# Altium PCB carrier_board.PcbDoc (part 15 of 18)
Units mm, origin at the board's own origin, x right, y up, seen from the top; angles counter-clockwise.
Board outline 146 x 102 mm, 20 copper layers (F.Cu, F.Mask, B.Cu, B.Mask, In1.Cu, F.SilkS, In2.Cu, B.SilkS, F.Adhes, B.Adhes, F.Paste, B.Paste, Dwgs.User, Cmts.User, Eco1.User, Eco2.User, Edge.Cuts, Margin, B.CrtYd, F.CrtYd); 256 components, 384 nets, 1262 pads, 1024 vias.
Unrouted connection lines stored in the file: 117.
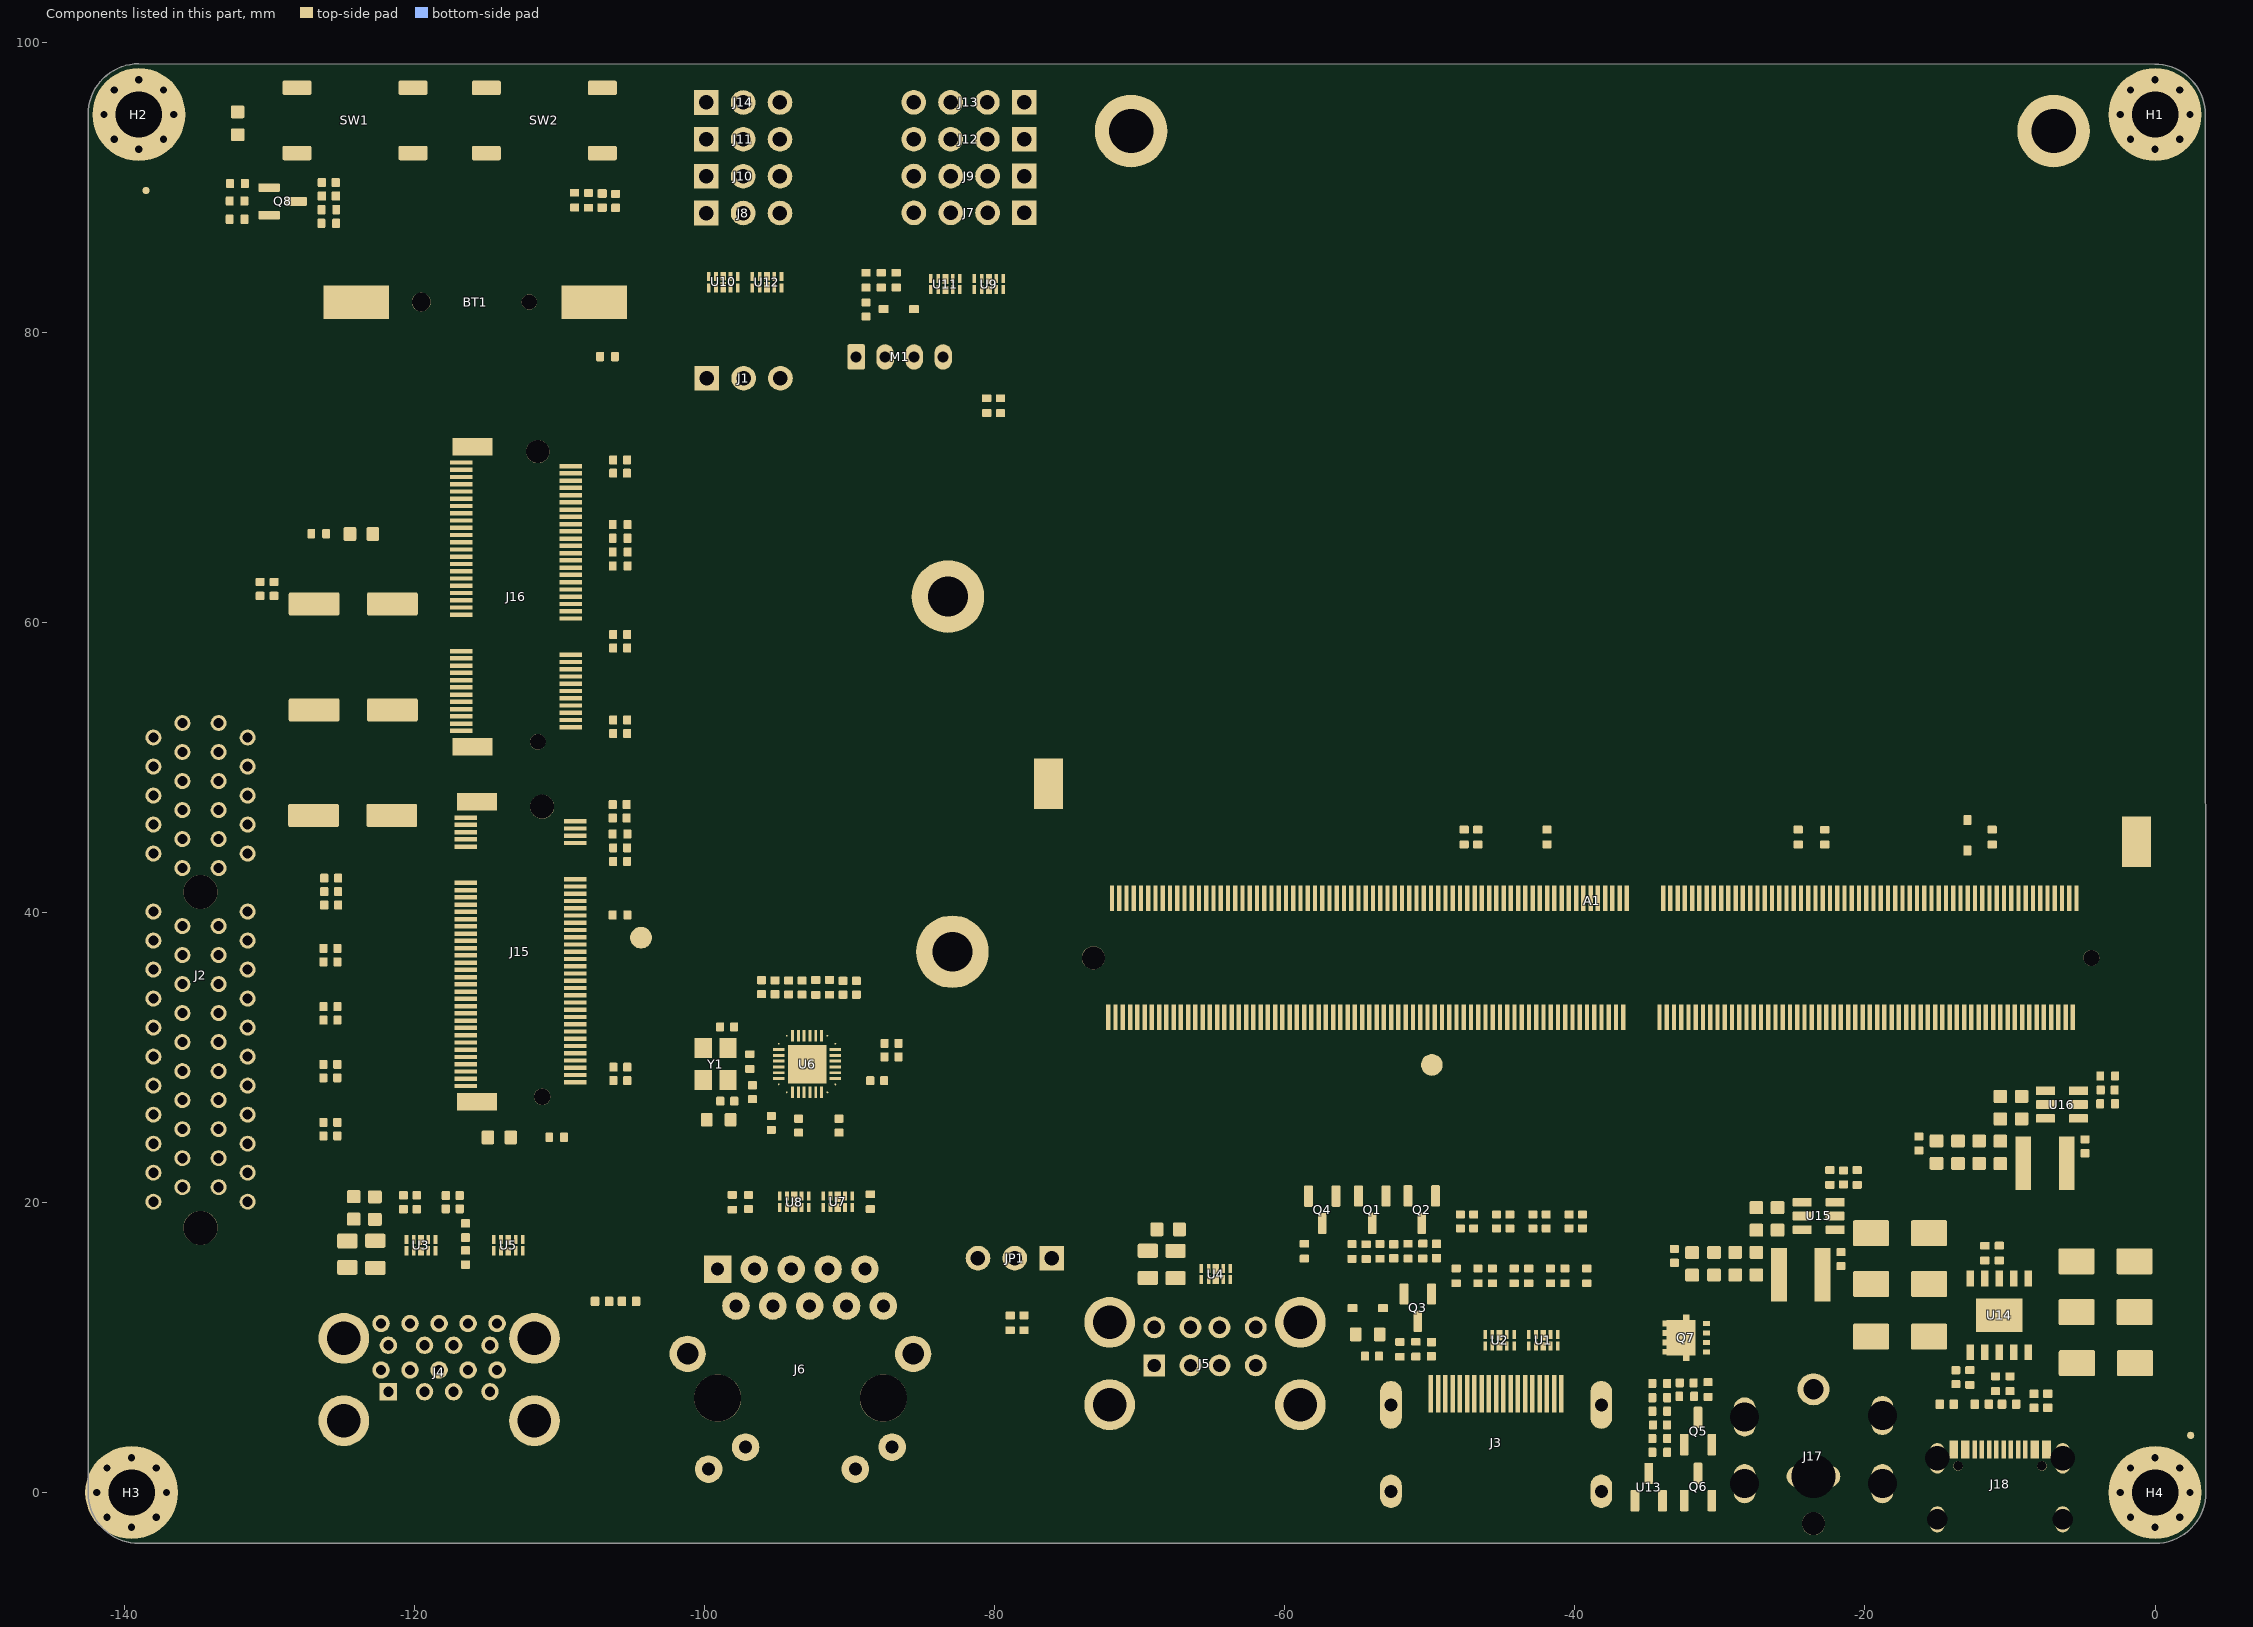
[diagram p25: the components of this part, seen from the top]

## Polygon pours and split planes (outlines as drawn) (continued)
SUSCLK_WIFI on F.Cu "F.Cu-/LattePanda Module/SUSCLK_WIFI-4" (solid, remove dead copper, pour order 31850): -104.28,45.564 -104.275,45.642 -104.263,45.698 -104.237,45.763 -104.209,45.827 -104.184,45.921 -104.38,45.961 -104.576,45.921 -104.535,45.789 -104.523,45.763 -104.493,45.684 -104.48,45.564
GbE_PCIe_RX- on F.Cu "F.Cu-/Gigabit Ethernet/GbE_PCIe_RX--1" (solid, remove dead copper, pour order 31970): -90.046,38.277 -90.037,38.439 -90.031,38.538 -90.05,38.679 -90.246,38.641 -90.412,38.529 -90.346,38.457 -90.303,38.428 -90.269,38.404 -90.241,38.376 -90.223,38.336 -90.216,38.277
GbE_PCIe_CLK- on F.Cu "F.Cu-/Gigabit Ethernet/GbE_PCIe_CLK-" (solid, remove dead copper, pour order 31942): -65.543,38.471 -65.381,38.462 -65.282,38.456 -65.141,38.475 -65.179,38.671 -65.291,38.837 -65.363,38.771 -65.392,38.728 -65.416,38.694 -65.444,38.666 -65.484,38.648 -65.543,38.641
GND on F.Cu "F.Cu-GND-71" (solid, remove dead copper, pour order 31740): -90.98,18.166 -90.975,18.205 -90.962,18.23 -90.921,18.248 -90.864,18.25 -90.783,18.253 -90.741,18.263 -90.699,18.284 -90.81,18.451 -90.976,18.561 -91.079,18.432 -91.121,18.382 -91.153,18.329 -91.173,18.262 -91.18,18.166
+5V on F.Cu "F.Cu-+5V-7" (solid, remove dead copper, pour order 31385): -21.83,22.43 -21.913,22.423 -22.004,22.415 -22.097,22.418 -22.178,22.442 -22.211,22.466 -22.235,22.5 -22.421,22.23 -22.235,21.96 -22.189,22.012 -22.115,22.04 -22.001,22.044 -21.913,22.037 -21.83,22.03
DDI_B_HPD on F.Cu "F.Cu-/HDMI/DDI_B_HPD-3" (solid, remove dead copper, pour order 31738): -31.016,30.705 -30.936,30.701 -30.878,30.689 -30.816,30.664 -30.752,30.639 -30.659,30.614 -30.619,30.81 -30.659,31.006 -30.794,30.965 -30.816,30.956 -30.895,30.927 -31.016,30.915
CON_USB3_D_N on F.Cu "F.Cu-/USB2.0&USB3.0/CON_USB3_D_N-1" (solid, remove dead copper, pour order 31934): -84.117,18.041 -84.168,18.046 -84.205,18.059 -84.251,18.103 -84.268,18.128 -84.306,18.182 -84.369,18.237 -84.481,18.071 -84.519,17.875 -84.414,17.859 -84.34,17.857 -84.279,17.862 -84.117,17.871
Net-(Q4-D) on F.Cu "F.Cu-Net-(Q4-D)-2" (solid, remove dead copper, pour order 31418): -38.816,15.964 -38.897,15.892 -39.001,15.817 -39.087,15.769 -39.177,15.735 -39.237,15.722 -39.297,15.72 -39.186,15.449 -38.865,15.388 -38.867,15.48 -38.832,15.591 -38.756,15.719 -38.671,15.819
I2C5_SDA on F.Cu "F.Cu-/GPIO/I2C5_SDA-1" (solid, remove dead copper, pour order 31065): 23 vertices, not listed, extent -85.736,87.224 -84.574,88.386
HSIO_9_TX- on F.Cu "F.Cu-/LattePanda Module/HSIO_9_TX--1" (solid, remove dead copper, pour order 31898): -61.364,29.651 -61.373,29.486 -61.379,29.385 -61.36,29.241 -61.164,29.279 -60.998,29.391 -61.069,29.473 -61.087,29.488 -61.142,29.548 -61.158,29.59 -61.163,29.651
+5V on F.Cu "F.Cu-+5V-6" (solid, remove dead copper, pour order 31104): 19 vertices, not listed, extent -87.551,77.264 -86.524,78.539
I2C3_SCL on F.Cu "F.Cu-/GPIO/I2C3_SCL-2" (solid, remove dead copper, pour order 32135): -82.975,83.37 -82.975,83.355 -82.979,83.285 -82.994,83.257 -83.025,83.245 -82.9,82.932 -82.775,83.245 -82.796,83.25 -82.811,83.262 -82.825,83.307 -82.825,83.355 -82.825,83.37
GND on F.Cu "F.Cu-GND-70" (solid, remove dead copper, pour order 32020): -23.065,33.924 -23.06,33.958 -23.047,33.978 -23.005,33.992 -22.981,33.994 -22.926,34 -22.869,34.024 -22.98,34.191 -23.176,34.229 -23.213,34.115 -23.225,34.092 -23.253,34.026 -23.265,33.924
+3V3 on F.Cu "F.Cu-+3V3-37" (solid, remove dead copper, pour order 31645): -109.15,24.59 -109.22,24.596 -109.303,24.615 -109.363,24.641 -109.412,24.678 -109.437,24.711 -109.451,24.75 -109.453,24.76 -109.691,24.49 -109.453,24.22 -109.426,24.285 -109.367,24.337 -109.269,24.375 -109.15,24.39
FAN_1_TAC on F.Cu "F.Cu-/Fan_Temp/FAN_1_TAC-2" (solid, remove dead copper, pour order 31824): -77.311,75.309 -77.259,75.251 -77.228,75.202 -77.201,75.138 -77.175,75.074 -77.126,74.989 -76.959,75.099 -76.849,75.266 -76.971,75.331 -76.998,75.341 -77.076,75.375 -77.169,75.451
GND on F.Cu "F.Cu-GND-69" (solid, remove dead copper, pour order 31819): -49.436,9.309 -49.384,9.251 -49.353,9.202 -49.326,9.138 -49.3,9.074 -49.251,8.989 -49.084,9.099 -48.974,9.266 -49.096,9.331 -49.123,9.341 -49.201,9.375 -49.294,9.451
GND on F.Cu "F.Cu-GND-68" (solid, remove dead copper, pour order 31876): -65.065,34.384 -65.06,34.452 -65.048,34.503 -65.01,34.577 -64.974,34.642 -64.944,34.741 -65.14,34.781 -65.336,34.741 -65.297,34.595 -65.274,34.51 -65.265,34.384
REFCLK0- on F.Cu "F.Cu-/LattePanda Module/REFCLK0--1" (solid, remove dead copper, pour order 31933): -49.545,38.532 -49.506,38.565 -49.47,38.581 -49.407,38.583 -49.377,38.577 -49.312,38.566 -49.229,38.572 -49.267,38.768 -49.379,38.934 -49.464,38.871 -49.518,38.82 -49.557,38.774 -49.665,38.653
Net-(D26-A) on F.Cu "F.Cu-Net-(D26-A)-2" (solid, remove dead copper, pour order 31384): -87.23,84.29 -87.313,84.283 -87.404,84.275 -87.497,84.278 -87.578,84.302 -87.611,84.326 -87.635,84.36 -87.821,84.09 -87.635,83.82 -87.589,83.872 -87.515,83.9 -87.401,83.904 -87.313,83.897 -87.23,83.89
DDC_SCL on F.Cu "F.Cu-/HDMI/DDC_SCL-2" (solid, remove dead copper, pour order 31346): -48.03,8.255 -48.028,8.229 -48.029,8.149 -48.045,8.118 -48.08,8.105 -47.93,6.804 -47.78,8.105 -47.803,8.11 -47.819,8.122 -47.833,8.167 -47.832,8.229 -47.83,8.255
+5V on F.Cu "F.Cu-+5V-5" (solid, remove dead copper, pour order 31152): 18 vertices, not listed, extent -69.441,16.18 -68.253,17.094
{\W\A\K\E\}\ on F.Cu "F.Cu-/~{WAKE}-3" (solid, remove dead copper, pour order 31868): -110.499,41.831 -110.551,41.889 -110.582,41.938 -110.609,42.002 -110.635,42.066 -110.684,42.151 -110.851,42.041 -110.961,41.874 -110.839,41.809 -110.812,41.799 -110.734,41.765 -110.641,41.689
DDC_SDA on F.Cu "F.Cu-/HDMI/DDC_SDA-1" (solid, remove dead copper, pour order 31615): -50.938,10.93 -50.959,10.827 -50.985,10.772 -51.024,10.722 -51.063,10.689 -51.11,10.666 -51.179,10.654 -50.965,10.389 -50.655,10.577 -50.694,10.615 -50.721,10.694 -50.733,10.831 -50.733,10.899 -50.732,10.93
TMDS_D2- on F.Cu "F.Cu-/HDMI/TMDS_D2--3" (solid, remove dead copper, pour order 32079): -41.783,11.322 -41.778,11.29 -41.77,11.229 -41.78,11.206 -41.805,11.197 -41.68,10.884 -41.555,11.197 -41.575,11.202 -41.586,11.215 -41.589,11.257 -41.582,11.29 -41.577,11.322
DDI_B_HPD on F.Cu "F.Cu-/HDMI/DDI_B_HPD-2" (solid, remove dead copper, pour order 31350): -54.482,21.031 -54.51,21.01 -54.55,20.996 -54.582,20.996 -54.612,21.011 -54.632,21.034 -54.647,21.071 -54.659,21.131 -54.921,20.444 -54.62,20.321 -54.602,20.447 -54.543,20.595 -54.441,20.758 -54.334,20.883
PCIE30_TX3_P on F.Cu "F.Cu-/PCIe x4/PCIE30_TX3_P" (solid, remove dead copper, pour order 31278): -136.723,24.843 -136.682,24.877 -136.645,24.894 -136.617,24.896 -136.591,24.888 -136.535,24.844 -136.478,24.772 -136.402,24.678 -136.306,24.593 -135.999,25.051 -136.457,25.356 -136.532,25.253 -136.593,25.184 -136.677,25.112 -136.843,24.963
Net-(U6-CKXTAL2) on F.Cu "F.Cu-Net-(U6-CKXTAL2)-2" (solid, remove dead copper, pour order 31204): 18 vertices, not listed, extent -98.771,27.24 -97.785,28.441
Net-(D26-A) on F.Cu "F.Cu-Net-(D26-A)-1" (solid, remove dead copper, pour order 31383): -87.38,83.89 -87.297,83.897 -87.206,83.905 -87.113,83.902 -87.032,83.878 -86.999,83.854 -86.975,83.82 -86.789,84.09 -86.975,84.36 -87.021,84.308 -87.095,84.28 -87.209,84.276 -87.297,84.283 -87.38,84.29
HSIO_3_RX- on F.Cu "F.Cu-/LattePanda Module/HSIO_3_RX-" (solid, remove dead copper, pour order 31928): -63.444,42.177 -63.439,42.228 -63.426,42.265 -63.382,42.311 -63.357,42.328 -63.303,42.366 -63.248,42.429 -63.414,42.541 -63.61,42.579 -63.626,42.474 -63.628,42.4 -63.623,42.339 -63.614,42.177
SOC_UART2_TX on F.Cu "F.Cu-/GPIO/SOC_UART2_TX" (solid, remove dead copper, pour order 31050): 23 vertices, not listed, extent -94.801,90.043 -93.466,91.457
Net-(U6-CKXTAL1) on F.Cu "F.Cu-Net-(U6-CKXTAL1)-1" (solid, remove dead copper, pour order 31137): 18 vertices, not listed, extent -100.234,29.633 -99.078,30.888
GND on F.Cu "F.Cu-GND-67" (solid, remove dead copper, pour order 31786): -9.815,41.994 -9.81,42.075 -9.798,42.132 -9.774,42.194 -9.748,42.258 -9.724,42.351 -9.92,42.391 -10.116,42.351 -10.076,42.223 -10.06,42.191 -10.029,42.113 -10.015,41.994
CON_USB4_SSRX_N on F.Cu "F.Cu-/USB2.0&USB3.0/CON_USB4_SSRX_N-3" (solid, remove dead copper, pour order 32024): -112.559,17.007 -112.559,17.013 -112.55,17.087 -112.527,17.119 -112.482,17.133 -112.53,17.446 -112.655,17.462 -112.667,17.323 -112.697,17.188 -112.719,17.091 -112.729,17.007
DDC_SCL on F.Cu "F.Cu-/HDMI/DDC_SCL-1" (solid, remove dead copper, pour order 31499): -49.895,17.275 -50.053,17.288 -50.14,17.313 -50.211,17.359 -50.248,17.42 -50.486,17.16 -50.248,16.9 -50.211,16.956 -50.139,16.996 -50.025,17.02 -49.895,17.025
TMDS_D0- on F.Cu "F.Cu-/HDMI/TMDS_D0--2" (solid, remove dead copper, pour order 32084): -44.793,10.547 -44.788,10.515 -44.78,10.454 -44.79,10.431 -44.815,10.422 -44.69,10.109 -44.565,10.422 -44.585,10.427 -44.596,10.44 -44.599,10.482 -44.592,10.515 -44.587,10.547
+3V3 on F.Cu "F.Cu-+3V3-36" (solid, remove dead copper, pour order 31449): -95.796,25.458 -95.667,25.559 -95.578,25.608 -95.481,25.649 -95.4,25.672 -95.32,25.681 -95.284,25.68 -95.399,25.961 -95.71,26.046 -95.71,25.94 -95.747,25.808 -95.824,25.662 -95.902,25.564
Net-(Q8-G) on F.Cu "F.Cu-Net-(Q8-G)-1" (solid, remove dead copper, pour order 31493): -131.348,89.558 -131.482,89.454 -131.566,89.408 -131.656,89.373 -131.723,89.36 -131.787,89.359 -131.793,89.36 -131.721,89.039 -131.45,88.935 -131.443,89.059 -131.399,89.207 -131.315,89.362 -131.242,89.452
SUSCLK_WIFI on F.Cu "F.Cu-/LattePanda Module/SUSCLK_WIFI-3" (solid, remove dead copper, pour order 31838): -39.57,37.324 -39.565,37.402 -39.553,37.458 -39.527,37.523 -39.499,37.587 -39.474,37.681 -39.67,37.721 -39.866,37.681 -39.825,37.549 -39.813,37.523 -39.783,37.444 -39.77,37.324
CON_USB3_SSRX_N on F.Cu "F.Cu-/USB2.0&USB3.0/CON_USB3_SSRX_N" (solid, remove dead copper, pour order 31958): -114.229,15.853 -114.238,15.691 -114.244,15.592 -114.225,15.451 -114.029,15.489 -113.863,15.601 -113.929,15.673 -113.972,15.702 -114.006,15.726 -114.034,15.754 -114.052,15.794 -114.059,15.853
+1V0 on F.Cu "F.Cu-+1V0-6" (solid, remove dead copper, pour order 31985): -93.528,33.656 -93.58,33.611 -93.624,33.584 -93.703,33.558 -93.775,33.537 -93.866,33.489 -93.756,33.322 -93.589,33.212 -93.534,33.322 -93.52,33.375 -93.493,33.455 -93.466,33.499 -93.422,33.55
CON_USB1_D_P on F.Cu "F.Cu-/USB2.0&USB3.0/CON_USB1_D_P-3" (solid, remove dead copper, pour order 32021): -63.779,14.242 -63.779,14.248 -63.77,14.322 -63.747,14.354 -63.702,14.367 -63.75,14.681 -63.875,14.697 -63.887,14.558 -63.917,14.423 -63.939,14.326 -63.949,14.242
CON_USB3_SSTX_N on F.Cu "F.Cu-/USB2.0&USB3.0/CON_USB3_SSTX_N-1" (solid, remove dead copper, pour order 31538): -120.081,19.027 -120.029,19.109 -119.984,19.152 -119.929,19.191 -119.867,19.222 -119.799,19.243 -119.69,19.252 -119.842,19.533 -120.152,19.568 -120.143,19.462 -120.167,19.301 -120.229,19.088 -120.251,19.027
Net-(U14-VBUS) on F.Cu "F.Cu-Net-(U14-VBUS)-1" (solid, remove dead copper, pour order 31379): -10.865,15.575 -10.867,15.505 -10.882,15.421 -10.898,15.382 -10.921,15.35 -10.953,15.328 -10.995,15.32 -10.74,14.769 -10.485,15.32 -10.518,15.325 -10.545,15.338 -10.585,15.387 -10.609,15.473 -10.615,15.575
+3V3 on F.Cu "F.Cu-+3V3-35" (solid, remove dead copper, pour order 31653): -107.995,31.38 -108.021,31.378 -108.101,31.379 -108.132,31.395 -108.145,31.43 -108.921,31.28 -108.145,31.13 -108.14,31.153 -108.128,31.169 -108.083,31.183 -108.021,31.182 -107.995,31.18
HSIO_10_TX- on F.Cu "F.Cu-/LattePanda Module/HSIO_10_TX--2" (solid, remove dead copper, pour order 31525): -124.816,29.003 -125.009,28.937 -125.123,28.908 -125.236,28.892 -125.3,28.892 -125.358,28.9 -125.321,28.59 -125.04,28.439 -125.027,28.561 -124.979,28.679 -124.9,28.778 -124.816,28.832
HSIO_10_TX+ on F.Cu "F.Cu-/LattePanda Module/HSIO_10_TX+-2" (solid, remove dead copper, pour order 31542): -124.816,29.275 -124.898,29.328 -124.942,29.374 -124.98,29.43 -125.01,29.493 -125.031,29.562 -125.04,29.668 -125.321,29.517 -125.358,29.207 -125.251,29.216 -125.091,29.192 -124.881,29.129 -124.816,29.104
DDI_B_TX1+ on F.Cu "F.Cu-/HDMI/DDI_B_TX1+" (solid, remove dead copper, pour order 31456): -42.384,19.683 -42.362,19.612 -42.295,19.37 -42.277,19.248 -42.285,19.142 -41.975,19.169 -41.817,19.45 -41.934,19.463 -42.04,19.511 -42.127,19.588 -42.158,19.635 -42.178,19.68 -42.179,19.683
GND on F.Cu "F.Cu-GND-66" (solid, remove dead copper, pour order 31754): -58.515,39.666 -58.52,39.585 -58.532,39.528 -58.556,39.466 -58.582,39.402 -58.606,39.309 -58.41,39.269 -58.214,39.309 -58.254,39.437 -58.27,39.469 -58.301,39.547 -58.315,39.666
GND on F.Cu "F.Cu-GND-65" (solid, remove dead copper, pour order 30996): 19 vertices, not listed, extent -86.914,92.466 -85.579,94.134
SOC_UART0_TX on F.Cu "F.Cu-/GPIO/SOC_UART0_TX" (solid, remove dead copper, pour order 31977): -64.307,76.393 -64.349,76.442 -64.375,76.485 -64.398,76.571 -64.416,76.647 -64.464,76.741 -64.631,76.631 -64.741,76.464 -64.625,76.404 -64.585,76.391 -64.507,76.361 -64.413,76.287
PCIE30_TX1_P on F.Cu "F.Cu-/PCIe x4/PCIE30_TX1_P" (solid, remove dead copper, pour order 31242): -136.758,32.862 -136.715,32.898 -136.677,32.916 -136.647,32.92 -136.619,32.913 -136.562,32.871 -136.491,32.785 -136.41,32.685 -136.306,32.593 -135.999,33.051 -136.306,33.507 -136.461,33.397 -136.566,33.31 -136.691,33.18 -136.878,32.982
+3V3 on F.Cu "F.Cu-+3V3-34" (solid, remove dead copper, pour order 32159): -108.885,27.98 -108.885,27.989 -108.884,28.031 -108.875,28.077 -108.849,28.115 -108.799,28.13 -108.92,28.281 -109.106,28.13 -109.088,28.125 -109.078,28.113 -109.073,28.065 -109.08,28.019 -109.085,27.98
Net-(Q7-G) on F.Cu "F.Cu-Net-(Q7-G)-3" (solid, remove dead copper, pour order 31469): -31.937,8.153 -31.94,8.067 -31.954,7.964 -31.989,7.866 -32.017,7.827 -32.054,7.797 -32.079,7.786 -31.81,7.561 -31.541,7.786 -31.601,7.825 -31.646,7.897 -31.674,8.01 -31.683,8.153
MDI0+ on F.Cu "F.Cu-/Gigabit Ethernet/MDI0+" (solid, remove dead copper, pour order 32160): -94.186,27.142 -94.206,27.232 -94.228,27.323 -94.235,27.423 -94.335,27.591 -94.319,27.19 -94.304,27.189 -94.298,27.179 -94.3,27.155 -94.302,27.142
CON_USB1_D_P on F.Cu "F.Cu-/USB2.0&USB3.0/CON_USB1_D_P-2" (solid, remove dead copper, pour order 31128): 20 vertices, not listed, extent -65.449,8.616 -64.354,9.64
SOC_UART0_RX on F.Cu "F.Cu-/GPIO/SOC_UART0_RX-1" (solid, remove dead copper, pour order 31038): 24 vertices, not listed, extent -100.63,86.86 -99.03,88.211
CON_USB3_SSRX_P on F.Cu "F.Cu-/USB2.0&USB3.0/CON_USB3_SSRX_P-3" (solid, remove dead copper, pour order 32068): -114.331,16.232 -114.347,16.346 -114.363,16.413 -114.393,16.548 -114.405,16.687 -114.53,16.671 -114.578,16.358 -114.549,16.353 -114.528,16.34 -114.506,16.298 -114.501,16.238 -114.501,16.232
Net-(Q4-G) on F.Cu "F.Cu-Net-(Q4-G)" (solid, remove dead copper, pour order 31640): -58.75,17.69 -58.756,17.62 -58.775,17.537 -58.801,17.477 -58.838,17.428 -58.871,17.403 -58.91,17.389 -58.92,17.387 -58.65,17.149 -58.38,17.387 -58.445,17.414 -58.497,17.473 -58.535,17.571 -58.55,17.69
GND on F.Cu "F.Cu-GND-64" (solid, remove dead copper, pour order 31759): -54.015,39.666 -54.02,39.585 -54.032,39.528 -54.056,39.466 -54.082,39.402 -54.106,39.309 -53.91,39.269 -53.714,39.309 -53.754,39.437 -53.77,39.469 -53.801,39.547 -53.815,39.666
TMDS_D0+ on F.Cu "F.Cu-/HDMI/TMDS_D0+-3" (solid, remove dead copper, pour order 32099): -44.293,11.322 -44.288,11.29 -44.28,11.229 -44.29,11.206 -44.315,11.197 -44.19,10.884 -44.065,11.197 -44.085,11.202 -44.096,11.215 -44.099,11.257 -44.092,11.29 -44.087,11.322
SOC_UART1_RX on F.Cu "F.Cu-/GPIO/SOC_UART1_RX-2" (solid, remove dead copper, pour order 32123): -99.135,82.618 -99.135,82.633 -99.131,82.703 -99.116,82.731 -99.085,82.742 -99.21,83.056 -99.335,82.742 -99.314,82.738 -99.299,82.725 -99.285,82.68 -99.285,82.633 -99.285,82.618
REFCLK2+ on F.Cu "F.Cu-/LattePanda Module/REFCLK2+" (solid, remove dead copper, pour order 31943): -46.843,36.171 -46.681,36.162 -46.582,36.156 -46.441,36.175 -46.479,36.371 -46.591,36.537 -46.663,36.471 -46.692,36.428 -46.716,36.394 -46.744,36.366 -46.784,36.348 -46.843,36.341
+1V0 on F.Cu "F.Cu-+1V0-5" (solid, remove dead copper, pour order 32008): -95.745,29.04 -95.877,29.034 -95.961,29.03 -96.081,29.046 -96.121,28.85 -96.009,28.684 -95.922,28.758 -95.914,28.766 -95.851,28.82 -95.807,28.834 -95.745,28.84
SUSCLK_WIFI on F.Cu "F.Cu-/LattePanda Module/SUSCLK_WIFI-2" (solid, remove dead copper, pour order 31815): -59.366,43.03 -59.288,43.025 -59.232,43.013 -59.167,42.987 -59.103,42.959 -59.009,42.934 -58.969,43.13 -59.009,43.326 -59.141,43.285 -59.167,43.273 -59.246,43.243 -59.366,43.23
{\C\L\K\R\E\Q\E\}\ on F.Cu "F.Cu-/M.2 E&M Key/~{CLKREQE}-1" (solid, remove dead copper, pour order 31643): -106.87,63.78 -106.8,63.774 -106.717,63.755 -106.657,63.729 -106.608,63.692 -106.583,63.659 -106.569,63.62 -106.567,63.61 -106.329,63.88 -106.567,64.15 -106.594,64.085 -106.653,64.033 -106.751,63.995 -106.87,63.98
USB_2_P7+ on F.Cu "F.Cu-/LattePanda Module/USB_2_P7+-1" (solid, remove dead copper, pour order 31939): -104.447,49.049 -104.609,49.058 -104.708,49.064 -104.849,49.045 -104.811,48.849 -104.699,48.683 -104.627,48.749 -104.598,48.792 -104.574,48.826 -104.546,48.854 -104.506,48.872 -104.447,48.879
Net-(Q5-D) on F.Cu "F.Cu-Net-(Q5-D)-1" (solid, remove dead copper, pour order 31398): -31.172,6.061 -31.094,6.135 -30.994,6.216 -30.879,6.284 -30.818,6.308 -30.756,6.321 -30.708,6.322 -30.819,6.593 -31.14,6.654 -31.139,6.567 -31.175,6.466 -31.254,6.348 -31.351,6.241
REFCLK0- on F.Cu "F.Cu-/LattePanda Module/REFCLK0-" (solid, remove dead copper, pour order 31491): -115.545,41.501 -115.546,41.501 -115.587,41.503 -115.637,41.512 -115.678,41.537 -115.69,41.558 -115.695,41.586 -116.471,41.53 -116.48,41.38 -116.163,41.378 -115.853,41.352 -115.545,41.331
GND on F.Cu "F.Cu-GND-63" (solid, remove dead copper, pour order 31803): -8.065,33.794 -8.06,33.875 -8.048,33.932 -8.024,33.994 -7.998,34.058 -7.974,34.151 -8.17,34.191 -8.366,34.151 -8.326,34.023 -8.31,33.991 -8.279,33.913 -8.265,33.794
PWR_EN on F.Cu "F.Cu-/PSU/PWR_EN-4" (solid, remove dead copper, pour order 31450): -24.48,20.615 -24.486,20.548 -24.504,20.468 -24.53,20.406 -24.567,20.355 -24.599,20.331 -24.637,20.317 -24.66,20.315 -24.338,20.014 -24.058,20.315 -24.135,20.333 -24.199,20.385 -24.25,20.473 -24.278,20.586 -24.28,20.615
GND on F.Cu "F.Cu-GND-62" (solid, remove dead copper, pour order 31795): -15.815,41.994 -15.81,42.075 -15.798,42.132 -15.774,42.194 -15.748,42.258 -15.724,42.351 -15.92,42.391 -16.116,42.351 -16.076,42.223 -16.06,42.191 -16.029,42.113 -16.015,41.994
{\P\L\T\_\R\S\T\}\ on F.Cu "F.Cu-/~{PLT_RST}-2" (solid, remove dead copper, pour order 31881): -50.824,29.58 -50.897,29.585 -50.951,29.597 -51.02,29.628 -51.085,29.659 -51.181,29.686 -51.221,29.49 -51.181,29.294 -51.041,29.335 -51.026,29.341 -50.946,29.369 -50.824,29.38
I2C2_SCL on F.Cu "F.Cu-/GPIO/I2C2_SCL-2" (solid, remove dead copper, pour order 31989): -82.297,84.247 -82.245,84.292 -82.201,84.319 -82.122,84.345 -82.05,84.365 -81.959,84.414 -82.069,84.581 -82.236,84.691 -82.291,84.581 -82.305,84.528 -82.332,84.448 -82.359,84.404 -82.403,84.353
Net-(Q5-S) on F.Cu "F.Cu-Net-(Q5-S)" (solid, remove dead copper, pour order 31376): -31.069,1.903 -31.096,1.883 -31.134,1.869 -31.167,1.869 -31.198,1.883 -31.219,1.905 -31.236,1.941 -31.249,2.006 -31.511,1.319 -31.21,1.196 -31.192,1.324 -31.133,1.474 -31.031,1.639 -30.927,1.761
TMDS_D0+ on F.Cu "F.Cu-/HDMI/TMDS_D0+-2" (solid, remove dead copper, pour order 31460): -44.686,17.697 -44.639,17.785 -44.598,17.83 -44.546,17.87 -44.49,17.9 -44.426,17.921 -44.324,17.93 -44.482,18.211 -44.792,18.238 -44.784,18.137 -44.808,17.981 -44.869,17.768 -44.891,17.697
TMDS_D2- on F.Cu "F.Cu-/HDMI/TMDS_D2--2" (solid, remove dead copper, pour order 32081): -41.577,9.673 -41.582,9.705 -41.59,9.766 -41.58,9.789 -41.555,9.797 -41.68,10.111 -41.805,9.797 -41.785,9.793 -41.774,9.78 -41.771,9.738 -41.778,9.705 -41.783,9.673
+12VA on F.Cu "F.Cu-+12VA" (solid, remove dead copper, pour order 30974): -33.413,23.054 -36.943,23.054 -36.95,9.1 -35.87,9.07 -32.07,9.07 -32.105,13.48 -33.41,13.48
Net-(U15-SW) on F.Cu "F.Cu-Net-(U15-SW)" (solid, remove dead copper, pour order 30980): -21.47,15.995 -22.4,15.995 -22.41,16.705 -23.675,18.115 -25,18.115 -25,17.225 -23.51,15.355 -21.47,15.355
PCIE30_TX2_P on F.Cu "F.Cu-/PCIe x4/PCIE30_TX2_P-1" (solid, remove dead copper, pour order 31240): -136.785,28.869 -136.741,28.906 -136.701,28.926 -136.67,28.93 -136.64,28.925 -136.581,28.886 -136.5,28.79 -136.414,28.687 -136.306,28.593 -135.999,29.051 -136.306,29.507 -136.52,29.357 -136.656,29.241 -136.771,29.125 -136.905,28.989
{\W\A\K\E\}\ on F.Cu "F.Cu-/~{WAKE}-2" (solid, remove dead copper, pour order 31678): -109.845,41.18 -109.819,41.182 -109.739,41.181 -109.708,41.165 -109.695,41.13 -108.919,41.28 -109.695,41.43 -109.7,41.407 -109.712,41.391 -109.757,41.377 -109.819,41.378 -109.845,41.38
+3V3 on F.Cu "F.Cu-+3V3-33" (solid, remove dead copper, pour order 31601): -2.22,28.845 -2.361,28.858 -2.437,28.883 -2.497,28.928 -2.514,28.956 -2.523,28.99 -2.761,28.72 -2.523,28.45 -2.514,28.484 -2.497,28.512 -2.439,28.556 -2.344,28.586 -2.22,28.595
+3V3 on F.Cu "F.Cu-+3V3-32" (solid, remove dead copper, pour order 31986): -96.643,24.823 -96.695,24.778 -96.739,24.751 -96.818,24.725 -96.89,24.705 -96.981,24.656 -96.871,24.489 -96.704,24.379 -96.649,24.489 -96.635,24.542 -96.608,24.622 -96.581,24.666 -96.537,24.717
HSIO_11_TX+ on F.Cu "F.Cu-/LattePanda Module/HSIO_11_TX+" (solid, remove dead copper, pour order 31545): -124.817,25.276 -124.899,25.33 -124.942,25.377 -124.981,25.433 -125.011,25.496 -125.031,25.565 -125.04,25.671 -125.321,25.52 -125.358,25.21 -125.252,25.219 -125.092,25.195 -124.884,25.131 -124.817,25.106
TMDS_D1- on F.Cu "F.Cu-/HDMI/TMDS_D1--2" (solid, remove dead copper, pour order 32100): -43.283,10.547 -43.278,10.515 -43.27,10.454 -43.28,10.431 -43.305,10.422 -43.18,10.109 -43.055,10.422 -43.075,10.427 -43.086,10.44 -43.089,10.482 -43.082,10.515 -43.077,10.547
Net-(U14-VBUS) on F.Cu "F.Cu-Net-(U14-VBUS)" (solid, remove dead copper, pour order 31600): -10.615,15.46 -10.602,15.601 -10.577,15.677 -10.532,15.737 -10.504,15.754 -10.47,15.763 -10.74,16.001 -11.01,15.763 -10.976,15.754 -10.948,15.737 -10.904,15.679 -10.874,15.584 -10.865,15.46
GND on F.Cu "F.Cu-GND-61" (solid, remove dead copper, pour order 31776): -67.32,42.254 -67.315,42.335 -67.303,42.392 -67.279,42.454 -67.253,42.518 -67.229,42.611 -67.425,42.651 -67.621,42.611 -67.581,42.483 -67.565,42.451 -67.534,42.373 -67.52,42.254
SOC_UART2_RX on F.Cu "F.Cu-/GPIO/SOC_UART2_RX-3" (solid, remove dead copper, pour order 32124): -98.135,82.618 -98.135,82.633 -98.131,82.703 -98.116,82.731 -98.085,82.742 -98.21,83.056 -98.335,82.742 -98.314,82.738 -98.299,82.725 -98.285,82.68 -98.285,82.633 -98.285,82.618
Net-(A1-TCP1_HPD) on F.Cu "F.Cu-Net-(A1-TCP1_HPD)" (solid, remove dead copper, pour order 31578): -25.194,44.58 -25.109,44.574 -25.008,44.553 -24.943,44.527 -24.887,44.489 -24.859,44.458 -24.841,44.42 -24.603,44.68 -24.841,44.94 -24.88,44.878 -24.955,44.828 -25.071,44.792 -25.194,44.78
Net-(D9-A) on F.Cu "F.Cu-Net-(D9-A)" (solid, remove dead copper, pour order 31632): -111.25,24.38 -111.177,24.374 -111.089,24.354 -111.03,24.328 -110.982,24.291 -110.958,24.259 -110.945,24.22 -110.945,24.216 -110.709,24.49 -110.95,24.756 -110.976,24.689 -111.035,24.636 -111.131,24.596 -111.25,24.58
+3V3 on F.Cu "F.Cu-+3V3-31" (solid, remove dead copper, pour order 31368): -106.09,28.73 -106.095,28.81 -106.102,28.906 -106.098,29.004 -106.072,29.09 -106.046,29.124 -106.01,29.15 -106.29,29.321 -106.57,29.15 -106.516,29.103 -106.485,29.027 -106.478,28.912 -106.485,28.81 -106.49,28.73
CON_PCIE_TX_1- on F.Cu "F.Cu-/M.2 E&M Key/CON_PCIE_TX_1-" (solid, remove dead copper, pour order 31483): -115.545,39.729 -115.853,39.708 -116.144,39.683 -116.48,39.68 -116.471,39.53 -115.695,39.474 -115.69,39.502 -115.678,39.523 -115.632,39.55 -115.546,39.559 -115.545,39.559
VPullup on F.Cu "F.Cu-VPullup-2" (solid, remove dead copper, pour order 31749): -12.84,46.584 -12.835,46.667 -12.823,46.727 -12.801,46.786 -12.777,46.85 -12.754,46.941 -12.95,46.981 -13.146,46.941 -13.106,46.816 -13.088,46.78 -13.054,46.703 -13.04,46.584
CON_PCIE_TX_1+ on F.Cu "F.Cu-/M.2 E&M Key/CON_PCIE_TX_1+" (solid, remove dead copper, pour order 31522): -106.801,44.031 -106.645,44.089 -106.454,44.138 -106.362,44.149 -106.278,44.144 -106.26,44.14 -106.299,44.45 -106.58,44.599 -106.593,44.476 -106.641,44.357 -106.721,44.256 -106.801,44.201
GND on F.Cu "F.Cu-GND-60" (solid, remove dead copper, pour order 31412): -49.41,15.576 -49.403,15.683 -49.372,15.809 -49.345,15.863 -49.308,15.908 -49.242,15.943 -49.538,16.167 -49.832,15.94 -49.765,15.906 -49.713,15.838 -49.676,15.731 -49.66,15.576
Net-(Q5-G) on F.Cu "F.Cu-Net-(Q5-G)-1" (solid, remove dead copper, pour order 31501): -33.09,4.79 -33.223,4.8 -33.298,4.818 -33.365,4.851 -33.397,4.881 -33.42,4.918 -33.427,4.942 -33.651,4.663 -33.427,4.383 -33.396,4.446 -33.332,4.493 -33.229,4.524 -33.09,4.536
Net-(J16-{\W\_\D\I\S\A\B\L\E\2\}\)\ on F.Cu "F.Cu-Net-(J16-~{W_DISABLE2})-1" (solid, remove dead copper, pour order 31670): -108.295,65.86 -108.321,65.858 -108.401,65.859 -108.432,65.875 -108.445,65.91 -109.221,65.76 -108.445,65.61 -108.44,65.633 -108.428,65.649 -108.383,65.663 -108.321,65.662 -108.295,65.66
HSIO_2_TX- on F.Cu "F.Cu-/LattePanda Module/HSIO_2_TX--1" (solid, remove dead copper, pour order 31523): -104.839,43.929 -104.995,43.871 -105.186,43.822 -105.278,43.811 -105.362,43.816 -105.381,43.82 -105.341,43.51 -105.06,43.361 -105.047,43.484 -104.999,43.603 -104.919,43.704 -104.839,43.759
GND on F.Cu "F.Cu-GND-59" (solid, remove dead copper, pour order 31800): -21.565,33.794 -21.56,33.875 -21.548,33.932 -21.524,33.994 -21.498,34.058 -21.474,34.151 -21.67,34.191 -21.866,34.151 -21.826,34.023 -21.81,33.991 -21.779,33.913 -21.765,33.794
GND on F.Cu "F.Cu-GND-58" (solid, remove dead copper, pour order 31394): -104.78,53.46 -104.847,53.455 -104.929,53.448 -105.012,53.451 -105.08,53.478 -105.103,53.504 -105.117,53.54 -105.341,53.26 -105.117,52.98 -105.106,53.012 -105.088,53.035 -105.03,53.065 -104.936,53.072 -104.847,53.065 -104.78,53.06
Net-(U14-CFG1) on F.Cu "F.Cu-Net-(U14-CFG1)-1" (solid, remove dead copper, pour order 31599): -11.615,15.45 -11.602,15.591 -11.577,15.667 -11.532,15.727 -11.504,15.744 -11.47,15.753 -11.74,15.991 -12.01,15.753 -11.976,15.744 -11.948,15.727 -11.904,15.669 -11.874,15.574 -11.865,15.45
CON_USB4_SSRX_P on F.Cu "F.Cu-/USB2.0&USB3.0/CON_USB4_SSRX_P" (solid, remove dead copper, pour order 32048): -112.831,16.232 -112.847,16.346 -112.863,16.413 -112.893,16.548 -112.905,16.687 -113.03,16.671 -113.078,16.358 -113.049,16.353 -113.028,16.34 -113.006,16.298 -113.001,16.238 -113.001,16.232
GbE_PCIe_RX- on F.Cu "F.Cu-/Gigabit Ethernet/GbE_PCIe_RX-" (solid, remove dead copper, pour order 31539): -90.216,35.785 -90.268,35.703 -90.313,35.66 -90.369,35.621 -90.43,35.59 -90.499,35.569 -90.608,35.56 -90.455,35.279 -90.145,35.244 -90.154,35.35 -90.131,35.511 -90.068,35.724 -90.046,35.785
HSIO_2_TX+ on F.Cu "F.Cu-/LattePanda Module/HSIO_2_TX+" (solid, remove dead copper, pour order 31967): -65.966,36.987 -65.957,37.149 -65.951,37.248 -65.97,37.389 -66.166,37.351 -66.332,37.239 -66.266,37.167 -66.223,37.138 -66.189,37.114 -66.161,37.086 -66.143,37.046 -66.136,36.987
+3V3 on F.Cu "F.Cu-+3V3-30" (solid, remove dead copper, pour order 31567): -105.21,66.14 -105.204,66.225 -105.183,66.326 -105.157,66.391 -105.119,66.447 -105.088,66.475 -105.05,66.493 -105.31,66.731 -105.57,66.493 -105.508,66.454 -105.458,66.379 -105.422,66.263 -105.41,66.14
Net-(U6-LANWAKEB) on F.Cu "F.Cu-Net-(U6-LANWAKEB)-1" (solid, remove dead copper, pour order 31510): -92.723,33.815 -92.591,33.919 -92.502,33.969 -92.405,34.01 -92.326,34.031 -92.247,34.04 -92.223,34.04 -92.334,34.31 -92.655,34.372 -92.652,34.273 -92.684,34.15 -92.757,34.012 -92.829,33.921
+3V3 on F.Cu "F.Cu-+3V3-29" (solid, remove dead copper, pour order 32162): 20 vertices, not listed, extent -94.602,33.188 -94.285,33.33
Net-(D25-A2) on F.Cu "F.Cu-Net-(D25-A2)-1" (solid, remove dead copper, pour order 31110): 19 vertices, not listed, extent -115.051,91.859 -113.55,92.821
GND on F.Cu "F.Cu-GND-57" (solid, remove dead copper, pour order 31573): -24.014,45.8 -24.099,45.806 -24.2,45.827 -24.265,45.853 -24.321,45.891 -24.349,45.922 -24.367,45.96 -24.605,45.7 -24.367,45.44 -24.328,45.502 -24.253,45.552 -24.137,45.588 -24.014,45.6
SOC_UART2_RX on F.Cu "F.Cu-/GPIO/SOC_UART2_RX-2" (solid, remove dead copper, pour order 31059): 23 vertices, not listed, extent -95.796,87.214 -94.634,88.376
GND on F.Cu "F.Cu-GND-56" (solid, remove dead copper, pour order 31196): 18 vertices, not listed, extent -115.888,6.451 -114.799,7.449
CON_USB4_SSRX_N on F.Cu "F.Cu-/USB2.0&USB3.0/CON_USB4_SSRX_N-2" (solid, remove dead copper, pour order 32063): -112.729,17.107 -112.713,16.994 -112.697,16.927 -112.667,16.792 -112.655,16.653 -112.53,16.669 -112.482,16.983 -112.511,16.987 -112.532,17 -112.554,17.042 -112.559,17.102 -112.559,17.107
I2C2_SCL on F.Cu "F.Cu-/GPIO/I2C2_SCL-1" (solid, remove dead copper, pour order 32128): -82.475,83.37 -82.475,83.355 -82.479,83.285 -82.494,83.257 -82.525,83.245 -82.4,82.932 -82.275,83.245 -82.296,83.25 -82.311,83.262 -82.325,83.307 -82.325,83.355 -82.325,83.37
GND on F.Cu "F.Cu-GND-55" (solid, remove dead copper, pour order 31769): -57.015,39.666 -57.02,39.585 -57.032,39.528 -57.056,39.466 -57.082,39.402 -57.106,39.309 -56.91,39.269 -56.714,39.309 -56.754,39.437 -56.77,39.469 -56.801,39.547 -56.815,39.666
Net-(Q5-G) on F.Cu "F.Cu-Net-(Q5-G)" (solid, remove dead copper, pour order 31495): -33.513,5.953 -33.511,6.042 -33.495,6.149 -33.479,6.201 -33.456,6.246 -33.423,6.283 -33.38,6.306 -33.64,6.543 -33.9,6.306 -33.841,6.268 -33.799,6.197 -33.773,6.085 -33.767,5.953
USB_2_P7- on F.Cu "F.Cu-/LattePanda Module/USB_2_P7--1" (solid, remove dead copper, pour order 31492): -115.845,53.481 -115.846,53.481 -115.887,53.483 -115.937,53.492 -115.978,53.517 -115.99,53.538 -115.995,53.566 -116.771,53.51 -116.78,53.36 -116.463,53.358 -116.153,53.332 -115.845,53.311
TMDS_D2+ on F.Cu "F.Cu-/HDMI/TMDS_D2+-2" (solid, remove dead copper, pour order 32077): -41.283,11.322 -41.278,11.29 -41.27,11.229 -41.28,11.206 -41.305,11.197 -41.18,10.884 -41.055,11.197 -41.075,11.202 -41.086,11.215 -41.089,11.257 -41.082,11.29 -41.077,11.322
MDI3- on F.Cu "F.Cu-/Gigabit Ethernet/MDI3--1" (solid, remove dead copper, pour order 31101): 20 vertices, not listed, extent -90.006,14.468 -88.944,15.585
{\P\L\T\_\R\S\T\}\ on F.Cu "F.Cu-/~{PLT_RST}-1" (solid, remove dead copper, pour order 31134): 21 vertices, not listed, extent -49.861,28.856 -48.624,30.104
HSIO_9_TX+ on F.Cu "F.Cu-/LattePanda Module/HSIO_9_TX+-1" (solid, remove dead copper, pour order 31544): -124.807,33.256 -124.889,33.31 -124.932,33.357 -124.971,33.413 -125.001,33.476 -125.021,33.545 -125.03,33.651 -125.311,33.5 -125.348,33.19 -125.242,33.199 -125.082,33.175 -124.874,33.111 -124.807,33.086
HSIO_3_TX+ on F.Cu "F.Cu-/LattePanda Module/HSIO_3_TX+" (solid, remove dead copper, pour order 31908): -77.193,54.559 -77.142,54.554 -77.105,54.541 -77.059,54.497 -77.042,54.472 -77.004,54.418 -76.941,54.363 -76.829,54.529 -76.791,54.725 -76.896,54.741 -76.97,54.743 -77.031,54.738 -77.193,54.729
+3V3 on F.Cu "F.Cu-+3V3-28" (solid, remove dead copper, pour order 31266): -49.71,21.485 -49.715,21.409 -49.733,21.319 -49.76,21.241 -49.798,21.171 -49.833,21.131 -49.875,21.102 -49.899,21.092 -49.61,20.446 -49.321,21.092 -49.389,21.133 -49.446,21.211 -49.49,21.331 -49.51,21.485
GND on F.Cu "F.Cu-GND-54" (solid, remove dead copper, pour order 31358): -125.46,41.093 -125.455,41.013 -125.448,40.917 -125.452,40.819 -125.478,40.733 -125.504,40.699 -125.54,40.673 -125.26,40.502 -124.98,40.673 -125.034,40.72 -125.064,40.796 -125.072,40.911 -125.065,41.013 -125.06,41.093
USB_2_P7+ on F.Cu "F.Cu-/LattePanda Module/USB_2_P7+" (solid, remove dead copper, pour order 31920): -115.373,53.039 -115.322,53.034 -115.285,53.021 -115.239,52.977 -115.222,52.952 -115.184,52.898 -115.121,52.843 -115.009,53.009 -114.971,53.205 -115.076,53.221 -115.15,53.223 -115.211,53.218 -115.373,53.209
GND on F.Cu "F.Cu-GND-53" (solid, remove dead copper, pour order 31421): -104.77,64.08 -104.835,64.074 -104.91,64.065 -104.984,64.067 -105.043,64.092 -105.063,64.116 -105.073,64.15 -105.311,63.88 -105.073,63.61 -105.064,63.641 -105.048,63.664 -104.996,63.69 -104.908,63.694 -104.835,63.686 -104.77,63.68
Net-(A1-TCP0_HPD) on F.Cu "F.Cu-Net-(A1-TCP0_HPD)" (solid, remove dead copper, pour order 31631): -22.648,44.131 -22.642,44.212 -22.619,44.309 -22.594,44.366 -22.558,44.411 -22.528,44.431 -22.493,44.443 -22.775,44.672 -23.033,44.426 -22.963,44.401 -22.908,44.344 -22.866,44.25 -22.848,44.131
+3V3 on F.Cu "F.Cu-+3V3-27" (solid, remove dead copper, pour order 31364): -126.02,41.76 -126.025,41.84 -126.032,41.936 -126.028,42.034 -126.002,42.12 -125.976,42.154 -125.94,42.18 -126.22,42.351 -126.5,42.18 -126.446,42.133 -126.416,42.057 -126.408,41.942 -126.415,41.84 -126.42,41.76
GND on F.Cu "F.Cu-GND-52" (solid, remove dead copper, pour order 31713): -83.55,84.636 -83.556,84.487 -83.576,84.375 -83.576,84.373 -83.596,84.279 -83.4,84.239 -83.204,84.279 -83.224,84.373 -83.244,84.486 -83.25,84.636
TMDS_D2- on F.Cu "F.Cu-/HDMI/TMDS_D2--1" (solid, remove dead copper, pour order 31459): -39.986,17.697 -40.008,17.768 -40.075,18.01 -40.093,18.132 -40.085,18.238 -40.395,18.211 -40.553,17.93 -40.436,17.917 -40.33,17.869 -40.243,17.792 -40.212,17.745 -40.192,17.7 -40.191,17.697
GND on F.Cu "F.Cu-GND-51" (solid, remove dead copper, pour order 31820): -48.791,4.579 -48.739,4.521 -48.708,4.472 -48.681,4.408 -48.655,4.344 -48.606,4.259 -48.439,4.369 -48.329,4.536 -48.451,4.601 -48.478,4.611 -48.556,4.645 -48.649,4.721
+3V3 on F.Cu "F.Cu-+3V3-26" (solid, remove dead copper, pour order 32150): -94.01,31.99 -94.007,31.958 -94.005,31.89 -94.014,31.861 -94.035,31.84 -93.935,31.489 -93.835,31.84 -93.861,31.872 -93.865,31.932 -93.863,31.958 -93.86,31.99
+5V on F.Cu "F.Cu-+5V-4" (solid, remove dead copper, pour order 31149): 18 vertices, not listed, extent -68.717,16.17 -67.529,17.09
Net-(Q5-D) on F.Cu "F.Cu-Net-(Q5-D)" (solid, remove dead copper, pour order 31284): 17 vertices, not listed, extent -31.644,5.145 -31.196,6.217
CON_PCIE_TX_0+ on F.Cu "F.Cu-/M.2 E&M Key/CON_PCIE_TX_0+" (solid, remove dead copper, pour order 31480): -115.845,61.209 -116.153,61.188 -116.444,61.163 -116.78,61.16 -116.771,61.01 -115.995,60.954 -115.99,60.982 -115.978,61.003 -115.932,61.03 -115.846,61.039 -115.845,61.039
Net-(U6-ISOLATEB) on F.Cu "F.Cu-Net-(U6-ISOLATEB)-1" (solid, remove dead copper, pour order 31509): -91.773,33.825 -91.641,33.929 -91.552,33.979 -91.455,34.02 -91.376,34.041 -91.297,34.05 -91.273,34.05 -91.384,34.32 -91.705,34.382 -91.702,34.283 -91.734,34.16 -91.807,34.022 -91.879,33.931
HSIO_8_TX- on F.Cu "F.Cu-/LattePanda Module/HSIO_8_TX--2" (solid, remove dead copper, pour order 31903): -119.896,29.428 -119.824,29.423 -119.771,29.411 -119.701,29.378 -119.636,29.346 -119.539,29.317 -119.499,29.513 -119.539,29.709 -119.661,29.67 -119.701,29.648 -119.778,29.613 -119.896,29.598
Net-(BT1-+) on F.Cu "F.Cu-Net-(BT1-+)" (solid, remove dead copper, pour order 31641): -107.74,78.21 -107.67,78.204 -107.587,78.185 -107.527,78.159 -107.478,78.122 -107.453,78.089 -107.439,78.05 -107.437,78.04 -107.199,78.31 -107.437,78.58 -107.464,78.515 -107.523,78.463 -107.621,78.425 -107.74,78.41
+3V3 on F.Cu "F.Cu-+3V3-25" (solid, remove dead copper, pour order 31563): -51.741,9.823 -51.806,9.766 -51.89,9.71 -51.967,9.671 -52.051,9.644 -52.176,9.633 -52.066,9.362 -51.745,9.299 -51.748,9.401 -51.716,9.512 -51.648,9.625 -51.599,9.682
GND on F.Cu "F.Cu-GND-50" (solid, remove dead copper, pour order 31777): -12.565,33.794 -12.56,33.875 -12.548,33.932 -12.524,33.994 -12.498,34.058 -12.474,34.151 -12.67,34.191 -12.866,34.151 -12.826,34.023 -12.81,33.991 -12.779,33.913 -12.765,33.794
VDC on F.Cu "F.Cu-VDC-1" (solid, remove dead copper, pour order 30961): -7.46,26.46 -11.24,26.455 -11.23,31.42 -7.81,31.43 -7.81,34.57 -1.6,34.57 -1.6,29.63 -8.72,29.64 -8.725,27.055 -7.438,27.055
CON_USB2_D_N on F.Cu "F.Cu-/USB2.0&USB3.0/CON_USB2_D_N-2" (solid, remove dead copper, pour order 32054): -65.551,14.242 -65.567,14.356 -65.583,14.423 -65.613,14.558 -65.625,14.697 -65.75,14.681 -65.798,14.367 -65.769,14.363 -65.748,14.35 -65.726,14.308 -65.721,14.248 -65.721,14.242
REFCLK0+ on F.Cu "F.Cu-/LattePanda Module/REFCLK0+-1" (solid, remove dead copper, pour order 31916): -60.553,47.959 -60.502,47.954 -60.465,47.941 -60.419,47.897 -60.402,47.872 -60.364,47.818 -60.301,47.763 -60.189,47.929 -60.151,48.125 -60.256,48.141 -60.33,48.143 -60.391,48.138 -60.553,48.129
CON_USB2_D_P on F.Cu "F.Cu-/USB2.0&USB3.0/CON_USB2_D_P-1" (solid, remove dead copper, pour order 31125): 20 vertices, not listed, extent -65.449,11.236 -64.354,12.26
CON_USB4_D_N on F.Cu "F.Cu-/USB2.0&USB3.0/CON_USB4_D_N-3" (solid, remove dead copper, pour order 31161): 22 vertices, not listed, extent -119.888,10.149 -118.801,11.238
Net-(D23-A) on F.Cu "F.Cu-Net-(D23-A)" (solid, remove dead copper, pour order 31230): 18 vertices, not listed, extent -125.323,65.65 -124.446,66.525
DDI_B_DDC_SCL on F.Cu "F.Cu-/HDMI/DDI_B_DDC_SCL-1" (solid, remove dead copper, pour order 31262): -51.396,19.41 -51.39,19.496 -51.37,19.599 -51.343,19.674 -51.306,19.739 -51.272,19.774 -51.231,19.799 -51.221,19.803 -51.51,20.448 -51.799,19.803 -51.729,19.762 -51.671,19.685 -51.626,19.567 -51.605,19.424 -51.604,19.41
FAN_1_TAC on F.Cu "F.Cu-/Fan_Temp/FAN_1_TAC-1" (solid, remove dead copper, pour order 31882): -89.254,83.17 -89.327,83.175 -89.381,83.187 -89.45,83.218 -89.515,83.249 -89.611,83.276 -89.651,83.08 -89.611,82.884 -89.471,82.925 -89.456,82.931 -89.376,82.959 -89.254,82.97
PCIE30_TX0_P on F.Cu "F.Cu-/PCIe x4/PCIE30_TX0_P" (solid, remove dead copper, pour order 31528): -126.773,37.096 -126.591,37.16 -126.482,37.188 -126.373,37.206 -126.298,37.209 -126.232,37.2 -126.269,37.51 -126.55,37.661 -126.563,37.538 -126.611,37.42 -126.691,37.321 -126.773,37.266
Net-(U16-SW) on F.Cu "F.Cu-Net-(U16-SW)" (solid, remove dead copper, pour order 30959): -8.91,23.93 -11.1,23.93 -11.1,26.07 -10.94,26.23 -9.82,26.23 -9.04,25.45 -9.04,24.79 -8.91,24.66
SOC_UART1_TX on F.Cu "F.Cu-/GPIO/SOC_UART1_TX" (solid, remove dead copper, pour order 32145): -96.125,82.615 -96.125,82.63 -96.121,82.7 -96.106,82.728 -96.075,82.74 -96.2,83.053 -96.325,82.74 -96.304,82.735 -96.289,82.723 -96.275,82.678 -96.275,82.63 -96.275,82.615
+3V3 on F.Cu "F.Cu-+3V3-24" (solid, remove dead copper, pour order 31864): -51.879,9.402 -51.821,9.454 -51.772,9.485 -51.708,9.512 -51.643,9.538 -51.559,9.586 -51.669,9.753 -51.836,9.864 -51.9,9.742 -51.911,9.714 -51.945,9.637 -52.021,9.543
GND on F.Cu "F.Cu-GND-49" (solid, remove dead copper, pour order 31356): -105.17,46.84 -105.175,46.92 -105.182,47.016 -105.178,47.114 -105.152,47.2 -105.126,47.234 -105.09,47.26 -105.37,47.431 -105.65,47.26 -105.596,47.213 -105.566,47.137 -105.558,47.022 -105.565,46.92 -105.57,46.84
GND on F.Cu "F.Cu-GND-48" (solid, remove dead copper, pour order 31835): -44.53,4.766 -44.535,4.688 -44.547,4.632 -44.573,4.567 -44.601,4.503 -44.626,4.409 -44.43,4.369 -44.234,4.409 -44.275,4.541 -44.287,4.567 -44.317,4.646 -44.33,4.766
TMDS_D0- on F.Cu "F.Cu-/HDMI/TMDS_D0--1" (solid, remove dead copper, pour order 32106): -44.587,9.673 -44.592,9.705 -44.6,9.766 -44.59,9.789 -44.565,9.797 -44.69,10.111 -44.815,9.797 -44.795,9.793 -44.784,9.78 -44.781,9.738 -44.788,9.705 -44.793,9.673
{\P\W\R\_\S\W\}\ on F.Cu "F.Cu-/LattePanda Module/~{PWR_SW}-1" (solid, remove dead copper, pour order 31694): -124.85,88.515 -124.965,88.536 -125.03,88.562 -125.088,88.601 -125.122,88.636 -125.145,88.678 -125.153,88.71 -125.391,88.44 -125.153,88.17 -125.126,88.238 -125.064,88.298 -124.963,88.345 -124.85,88.365
TMDS_D0+ on F.Cu "F.Cu-/HDMI/TMDS_D0+-1" (solid, remove dead copper, pour order 32080): -44.087,10.448 -44.092,10.48 -44.1,10.541 -44.09,10.564 -44.065,10.572 -44.19,10.886 -44.315,10.572 -44.295,10.568 -44.284,10.555 -44.281,10.513 -44.288,10.48 -44.293,10.448
TMDS_CK- on F.Cu "F.Cu-/HDMI/TMDS_CK--1" (solid, remove dead copper, pour order 32101): -46.293,11.322 -46.288,11.29 -46.28,11.229 -46.29,11.206 -46.315,11.197 -46.19,10.884 -46.065,11.197 -46.085,11.202 -46.096,11.215 -46.099,11.257 -46.092,11.29 -46.087,11.322
SOC_UART2_RX on F.Cu "F.Cu-/GPIO/SOC_UART2_RX-1" (solid, remove dead copper, pour order 31975): -98.285,81.266 -98.29,81.19 -98.302,81.135 -98.33,81.069 -98.36,81.004 -98.386,80.909 -98.19,80.869 -97.994,80.909 -98.011,80.971 -98.032,81.017 -98.071,81.076 -98.116,81.149 -98.13,81.199 -98.135,81.266
+3V3 on F.Cu "F.Cu-+3V3-23" (solid, remove dead copper, pour order 31477): -106.455,47.09 -106.468,46.924 -106.494,46.833 -106.541,46.76 -106.599,46.724 -106.33,46.499 -106.061,46.724 -106.121,46.762 -106.166,46.835 -106.196,46.948 -106.205,47.09
GND on F.Cu "F.Cu-GND-47" (solid, remove dead copper, pour order 31730): -49.623,15.462 -49.6,15.431 -49.592,15.404 -49.607,15.36 -49.632,15.328 -49.669,15.277 -49.696,15.209 -49.499,15.169 -49.304,15.209 -49.324,15.371 -49.331,15.439 -49.346,15.5 -49.381,15.564 -49.447,15.638
{\W\A\K\E\}\ on F.Cu "F.Cu-/~{WAKE}-1" (solid, remove dead copper, pour order 31684): -117.695,65.91 -117.669,65.912 -117.589,65.911 -117.558,65.895 -117.545,65.86 -116.769,66.01 -117.545,66.16 -117.55,66.137 -117.562,66.121 -117.607,66.107 -117.669,66.108 -117.695,66.11
+3V3 on F.Cu "F.Cu-+3V3-22" (solid, remove dead copper, pour order 31610): -94.285,33.78 -94.266,33.866 -94.238,33.919 -94.2,33.969 -94.156,34.009 -94.104,34.041 -94.052,34.06 -93.996,34.069 -93.99,34.069 -94.205,34.341 -94.515,34.2 -94.478,34.142 -94.449,34.027 -94.436,33.845 -94.435,33.78
HSIO_8_RX- on F.Cu "F.Cu-/LattePanda Module/HSIO_8_RX-" (solid, remove dead copper, pour order 31957): -62.114,36.753 -62.123,36.591 -62.129,36.492 -62.11,36.351 -61.914,36.389 -61.748,36.501 -61.814,36.573 -61.857,36.602 -61.891,36.626 -61.919,36.654 -61.937,36.694 -61.944,36.753
HSIO_10_TX+ on F.Cu "F.Cu-/LattePanda Module/HSIO_10_TX+-1" (solid, remove dead copper, pour order 31894): -60.167,29.651 -60.171,29.594 -60.185,29.554 -60.229,29.5 -60.243,29.488 -60.285,29.449 -60.332,29.391 -60.166,29.279 -59.97,29.241 -59.953,29.347 -59.951,29.422 -59.957,29.486 -59.966,29.651
Net-(U13-REF) on F.Cu "F.Cu-Net-(U13-REF)-2" (solid, remove dead copper, pour order 31570): -33.54,3.133 -33.534,3.217 -33.513,3.318 -33.487,3.384 -33.449,3.439 -33.418,3.467 -33.38,3.486 -33.64,3.724 -33.9,3.486 -33.838,3.447 -33.788,3.372 -33.752,3.256 -33.74,3.133
+1V0 on F.Cu "F.Cu-+1V0-4" (solid, remove dead copper, pour order 32156): -93.46,27.09 -93.463,27.121 -93.465,27.189 -93.456,27.219 -93.435,27.24 -93.535,27.591 -93.635,27.24 -93.609,27.208 -93.605,27.148 -93.607,27.121 -93.61,27.09
VPullup on F.Cu "F.Cu-VPullup-1" (solid, remove dead copper, pour order 31588): -13.021,46.909 -13.037,46.808 -13.062,46.751 -13.099,46.697 -13.137,46.661 -13.184,46.633 -13.205,46.625 -12.939,46.359 -12.675,46.625 -12.737,46.664 -12.797,46.747 -12.85,46.882 -12.879,47.042 -12.879,47.051
Net-(U10-NC-Pad6) on F.Cu "F.Cu-Net-(U10-NC-Pad6)" (solid, remove dead copper, pour order 32110): -97.81,83.493 -97.805,83.461 -97.8,83.399 -97.809,83.377 -97.835,83.367 -97.71,83.054 -97.585,83.367 -97.605,83.372 -97.616,83.385 -97.62,83.428 -97.615,83.461 -97.61,83.493
GND on F.Cu "F.Cu-GND-46" (solid, remove dead copper, pour order 31852): -19.774,34.29 -19.852,34.295 -19.908,34.307 -19.973,34.333 -20.037,34.361 -20.131,34.386 -20.171,34.19 -20.131,33.994 -19.999,34.035 -19.973,34.047 -19.894,34.077 -19.774,34.09
GND on F.Cu "F.Cu-GND-45" (solid, remove dead copper, pour order 31828): -41.53,4.766 -41.535,4.688 -41.547,4.632 -41.573,4.567 -41.601,4.503 -41.626,4.409 -41.43,4.369 -41.234,4.409 -41.275,4.541 -41.287,4.567 -41.317,4.646 -41.33,4.766
HSIO_10_TX- on F.Cu "F.Cu-/LattePanda Module/HSIO_10_TX--1" (solid, remove dead copper, pour order 31909): -122.763,25.129 -122.712,25.124 -122.675,25.111 -122.629,25.067 -122.612,25.042 -122.574,24.989 -122.511,24.933 -122.399,25.099 -122.361,25.296 -122.466,25.312 -122.54,25.313 -122.601,25.308 -122.763,25.299
PWR_EN on F.Cu "F.Cu-/PSU/PWR_EN-3" (solid, remove dead copper, pour order 31878): -7.448,28.334 -7.443,28.408 -7.431,28.463 -7.401,28.53 -7.371,28.595 -7.344,28.691 -7.54,28.731 -7.736,28.691 -7.695,28.553 -7.687,28.535 -7.659,28.455 -7.648,28.334
Net-(D21-A2) on F.Cu "F.Cu-Net-(D21-A2)-2" (solid, remove dead copper, pour order 31146): 18 vertices, not listed, extent -121.6,91.859 -120.099,92.821
HSIO_9_TX- on F.Cu "F.Cu-/LattePanda Module/HSIO_9_TX-" (solid, remove dead copper, pour order 31907): -120.963,28.143 -120.912,28.138 -120.875,28.125 -120.829,28.081 -120.812,28.056 -120.774,28.002 -120.711,27.947 -120.599,28.113 -120.561,28.309 -120.666,28.325 -120.74,28.327 -120.801,28.322 -120.963,28.313
PWR_EN on F.Cu "F.Cu-/PSU/PWR_EN-2" (solid, remove dead copper, pour order 31574): -78.34,11.29 -78.425,11.296 -78.526,11.317 -78.591,11.343 -78.647,11.381 -78.675,11.412 -78.693,11.45 -78.931,11.19 -78.693,10.93 -78.654,10.992 -78.579,11.042 -78.463,11.078 -78.34,11.09
+12V on F.Cu "F.Cu-+12V-2" (solid, remove dead copper, pour order 31585): -32.71,6.042 -32.704,6.12 -32.685,6.213 -32.658,6.281 -32.621,6.34 -32.587,6.372 -32.546,6.394 -32.54,6.396 -32.8,6.633 -33.06,6.396 -33,6.357 -32.953,6.282 -32.92,6.164 -32.91,6.042
+12V on F.Cu "F.Cu-+12V-1" (solid, remove dead copper, pour order 31706): -35.089,2.682 -35.015,2.668 -34.976,2.645 -34.94,2.61 -34.914,2.57 -34.896,2.521 -34.891,2.493 -34.659,2.773 -34.904,3.033 -34.928,2.969 -34.992,2.909 -35.1,2.855 -35.231,2.823
CON_USB1_D_N on F.Cu "F.Cu-/USB2.0&USB3.0/CON_USB1_D_N" (solid, remove dead copper, pour order 32045): -64.051,14.242 -64.067,14.356 -64.083,14.423 -64.113,14.558 -64.125,14.697 -64.25,14.681 -64.298,14.367 -64.269,14.363 -64.248,14.35 -64.226,14.308 -64.221,14.248 -64.221,14.242
HSIO_11_TX- on F.Cu "F.Cu-/LattePanda Module/HSIO_11_TX-" (solid, remove dead copper, pour order 31530): -124.817,25.004 -124.999,24.94 -125.108,24.912 -125.217,24.894 -125.292,24.891 -125.358,24.9 -125.321,24.59 -125.04,24.439 -125.027,24.562 -124.979,24.68 -124.899,24.779 -124.817,24.834
Net-(J15-SUSCLK) on F.Cu "F.Cu-Net-(J15-SUSCLK)" (solid, remove dead copper, pour order 31668): -107.995,44.88 -108.021,44.878 -108.101,44.879 -108.132,44.895 -108.145,44.93 -108.921,44.78 -108.145,44.63 -108.14,44.653 -108.128,44.669 -108.083,44.683 -108.021,44.682 -107.995,44.68
Net-(JP1-C) on F.Cu "F.Cu-Net-(JP1-C)" (solid, remove dead copper, pour order 31847): -78.83,12.584 -78.825,12.662 -78.813,12.718 -78.787,12.783 -78.759,12.847 -78.734,12.941 -78.93,12.981 -79.126,12.941 -79.085,12.809 -79.073,12.783 -79.043,12.704 -79.03,12.584
VDC on F.Cu "F.Cu-VDC" (solid, remove dead copper, pour order 31579): -10.64,44.78 -10.725,44.786 -10.826,44.807 -10.891,44.833 -10.947,44.871 -10.975,44.902 -10.993,44.94 -11.231,44.68 -10.993,44.42 -10.954,44.482 -10.879,44.532 -10.763,44.568 -10.64,44.58
{\P\W\R\_\S\W\}\ on F.Cu "F.Cu-/LattePanda Module/~{PWR_SW}" (solid, remove dead copper, pour order 31976): -123.956,88.365 -123.89,88.36 -123.841,88.348 -123.765,88.306 -123.699,88.266 -123.599,88.234 -123.559,88.43 -123.599,88.626 -123.721,88.587 -123.761,88.565 -123.838,88.53 -123.956,88.515
HSIO_3_TX- on F.Cu "F.Cu-/LattePanda Module/HSIO_3_TX--1" (solid, remove dead copper, pour order 31948): -77.193,54.831 -77.031,54.822 -76.932,54.816 -76.791,54.835 -76.829,55.031 -76.941,55.197 -77.013,55.131 -77.042,55.088 -77.066,55.054 -77.094,55.026 -77.134,55.008 -77.193,55.001
+5V on F.Cu "F.Cu-+5V-3" (solid, remove dead copper, pour order 30969): -122.34,19.16 -126.19,19.16 -126.19,16.771 -126.18,16.77 -122.5,16.77 -122.34,16.93
CON_USB4_SSTX_N on F.Cu "F.Cu-/USB2.0&USB3.0/CON_USB4_SSTX_N" (solid, remove dead copper, pour order 32022): -118.579,16.232 -118.579,16.238 -118.57,16.312 -118.547,16.344 -118.502,16.358 -118.55,16.671 -118.675,16.687 -118.687,16.548 -118.717,16.413 -118.739,16.316 -118.749,16.232
Net-(U16-FB) on F.Cu "F.Cu-Net-(U16-FB)-1" (solid, remove dead copper, pour order 31290): -4.32,27.855 -4.455,27.863 -4.534,27.876 -4.608,27.899 -4.659,27.925 -4.698,27.96 -4.713,27.986 -5.283,27.697 -4.676,27.433 -4.644,27.51 -4.578,27.575 -4.474,27.626 -4.346,27.654 -4.32,27.655